# Altium PCB IdealDiode 03-1.0.PcbDoc
Units mm, origin at the board's own origin, x right, y up, seen from the top; angles counter-clockwise.
Board outline 5.33 x 10.41 mm, 2 copper layers (Top Layer, Bottom Layer), stack 1.025 mm thick; 10 components, 6 nets, 21 pads, 4 vias.
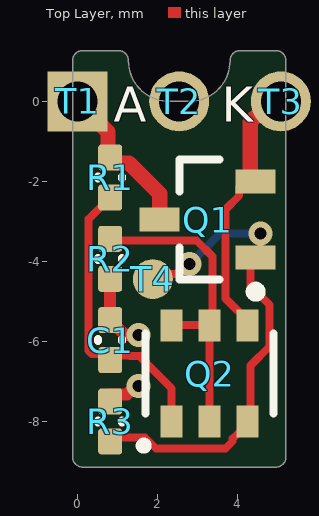
[diagram p0: Top Layer view]
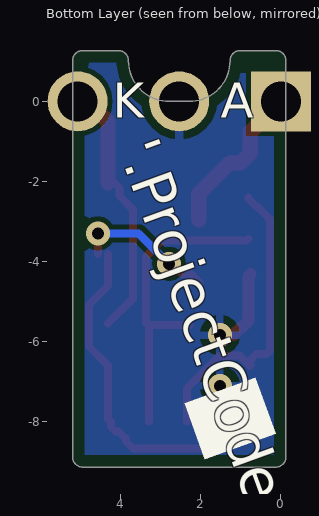
[diagram p1: Bottom Layer view, seen from below]

## Layer stack, top to bottom
Top Solder: solder mask 0.0102, Solder Resist, Dk 3.5
Top Layer: signal copper 0.0356
Dielectric 1: core 0.954, FR-4, Dk 4.2
Bottom Layer: signal copper 0.0356
Bottom Solder: solder mask 0.0102, Solder Resist, Dk 3.5

## Board outline
-0.127,-8.89 -0.127,1.016 cw(c0.127,1.016) 0.127,1.27 1.016,1.27 cw(c1.016,1.016) 1.27,1.016 ccw(c2.286,1.016) 2.286,0 2.794,0 ccw(c2.794,1.016) 3.81,1.016 cw(c4.064,1.016) 4.064,1.27 4.953,1.27 cw(c4.953,1.016) 5.207,1.016 5.207,-8.89 cw(c4.953,-8.89) 4.953,-9.144 0.127,-9.144 cw(c0.127,-8.89)

## Design rules (kind name [scope] priority, off if disabled: settings)
AssemblyTestPointUsage [All] p1: valid=2
AssemblyTestpoint [All] p1: testpointundercomponent=TRUE minsize=1.016 maxsize=2.54 preferedsize=1.524 minholesize=0 maxholesize=1.016 preferedholesize=0.813 testpointgrid=0.025 usegrid=FALSE gridtolerance=0 allowsidetop=TRUE allowsidebottom=TRUE
BoardOutlineClearance [All] p1: gap=0.3 ignorepadtopadclearanceinfootprint=FALSE except(0: Arc-SplitContinuation Track-SplitContinuation SMDPad-SplitContinuation THPad-SplitContinuation Via-SplitContinuation Fill-SplitContinuation Poly-SplitContinuation Region-SplitContinuation Text-SplitContinuation)
Clearance [All] p1: gap=0.125 ignorepadtopadclearanceinfootprint=FALSE except(0: Arc-Hole Track-Hole SMDPad-Hole THPad-Hole Via-Hole Fill-Hole Poly-Hole Region-Hole Text-Hole)
ComponentClearance [All] p1: gap=0.1 collisioncheckmode=3 verticalgap=0.254 showdistances=TRUE
DiffPairsRouting [All] p1: maxlimit=2 minlimit=0.15 mostfreqgap=0.15 toplayer_minwidth=0.15 toplayer_maxwidth=2 toplayer_prefwidth=0.15 bottomlayer_minwidth=0.15 bottomlayer_maxwidth=2 bottomlayer_prefwidth=0.15 maxuncoupledlength=25
FabricationTestPointUsage [All] p1: valid=2 allowmultiple=FALSE
FabricationTestpoint [All] p1: side=3 testpointundercomponent=TRUE minsize=1.016 maxsize=2.54 preferedsize=1.524 minholesize=0 maxholesize=1.016 preferedholesize=0.813 testpointgrid=0.025 allowsidetop=TRUE allowsidebottom=TRUE usegrid=FALSE gridtolerance=0
HoleSize [All] p1: absolutevalues=TRUE maxlimit=2.54 minlimit=0.2 maxpercent=80.000 minpercent=20.000
MinimumSolderMaskSliver [All] p1: minsoldermaskwidth=0.005
PlaneClearance [All] p1: clearance=0.3
PlaneConnect [All] p1: planeconnectstyle=Relief reliefexpansion=0.5 reliefentries=4 reliefconductorwidth=0.2 reliefairgap=0.3
PolygonConnect "PolygonConnect GND" [isVIA] p1: connectstyle=Relief reliefconductorwidth=0.2 reliefentries=4 polygonreliefangle="90 Angle" airgapwidth=0.2
PolygonConnect [All] p2: connectstyle=Relief reliefconductorwidth=0.2 reliefentries=4 polygonreliefangle="90 Angle" airgapwidth=0.2
RoutingVias [All] p1: holewidth=0.3 width=0.6 viastyle="Through Hole" minholewidth=0.3 minwidth=0.6 maxholewidth=0.3 maxwidth=0.8
SilkToSilkClearance [All] p1: silktosilkclearance=0.001
SilkToSolderMaskClearance [IsPad] p1: minsilkscreentomaskgap=0.05 clearancetoexposedcopper=TRUE
SolderMaskExpansion [All] p1: expansion=0.075
Width [All] p1: maxlimit=2 minlimit=0.15 preferedwidth=0.15 minimp=50.000000 maximp=50.000000 favimp=50.000000
18 further rules are at their usual default settings.

## Components (designator, comment, footprint, x,y, rotation, side; value= is the part's Value field where it differs from the comment)
C1 "0402YG104ZAT2A" CAP0402 0.813,-5.969 r270 top
Q1 "MOSFET" DIODES-SOT23-3 3.251,-2.959 r180 top
Q2 "BCM857DS" NXP-SOT457 3.302,-6.807 r0 top
R1 "" RES0402 0.813,-1.905 r90 top value=1k5
R2 "" RES0402 0.813,-3.937 r270 top value=150k
R3 "" RES0402 0.813,-8.001 r90 top value=330k
T1 "TestPointHole" PTH1.5mm-1.0mm#1 0,-0.254 r0 top
T2 "TestPointHole" PTH1.5mm-1.0mm#2 2.54,-0.254 r0 top
T3 "TestPointHole" PTH1.5mm-1.0mm#2 5.08,-0.254 r0 top
T4 "TestPoint" Pad1mm 1.88,-4.444 r0 top

## Footprints (in the part's own frame and the unit in brackets; to place one, negate y for a bottom-side part, rotate by r counter-clockwise, add the part's x,y. Pads: shape width x height; smd on the part's side, far side on the other; paste and mask are expansions set on the pad)
CAP0402 [mm] "Chip Capacitor 0402"
  rrect25% 0.65x0.6 smd: 1(-0.5,0) 2(0.5,0)
  silkscreen extent -0.03,-0.3 0.03,0.3, body extent -0.53,-0.28 0.53,0.27, height 0.5
DIODES-SOT23-3 [mm] "SOT23, 3-Leads, Body 2.90x2.45mm, Pitch 0.95mm, IPC Medium Density"
  rect 1x0.6 smd: 1(-1.2,0.95) 2(-1.2,-0.95) 3(1.2,0)
  silkscreen extent -1.33,-1.5 0.7,1.92, body extent -1.27,-1.5 1.23,1.5, height 1.1
NXP-SOT457 [mm]
  rect 0.55x0.8 smd: 1(-0.95,-1.2) 2(0,-1.2) 3(0.95,-1.2) 4(0.95,1.2) 5(0,1.2) 6(-0.95,1.2)
  silkscreen extent -1.75,-1.9 1.6,1, body extent -1.55,-1.6 1.55,1.6, height 1.45
Pad1mm [mm] "Testpoint Pad 1mm diameter"
  round 1 smd paste-1: 1(0,0)
PTH1.5mm-1.0mm#1 [mm] "1.5mm dia round pad w/ 1.0mm dia hole"
  rect 1.5x1.5 hole 1: 1(0,0.254)
PTH1.5mm-1.0mm#2 [mm] "1.5mm dia round pad w/ 1.0mm dia hole"
  round 1.5 hole 1: 1(0,0.254)
RES0402 [mm] "Chip Resistor 0402"
  rrect25% 0.65x0.6 smd: 1(-0.5,0) 2(0.5,0)
  silkscreen extent -0.03,-0.3 0.03,0.3, body extent -0.53,-0.28 0.53,0.27, height 0.35

## Part data
C1: "100nF 0402 16V", Capacitance=100nF, Case/Package=0402, Case Code (Metric)=1005, Dielectric=Y5V, Insulation Resistance=100GR, Manufacturer="Kyocera AVX", Max Operating Temperature=85°C, Min Operating Temperature=-30°C, Package Quantity=1, Supplier Part Number 1=478-1138-1-ND, Tolerance=80%, Voltage=16V, Case Code (Imperial)=0402, ComponentLink2Description="AVX datasheet online", ComponentLink2URL=http://datasheets.avx.com/Y5V.pdf, Contact Plating=Tin,Matte, Depth=0.5mm, Dissipation Factor=9%, Height=0.5mm, Lead Free="Lead Free", Length=1mm, Manufacturer Part Number=0402YG104ZAT2A, Mount="Surface Mount,PCB", Packaging="Tape and Reel", Pricing 1="1=0.1, 10=0.041, 100=0.0183, 500=0.01306, 1000=0.01026, 2500=0.00933, 5000=0.00858 (USD)", Radiation Hardening=No, REACH SVHC="No SVHC", Stock 1=0, Supplier 1=Digi-Key, Supplier 2=Farnell, Supplier 3=Mouser, Supplier 4=RSComponents, Supplier Part Number 2=1327667, Supplier Part Number 3=581-040216G104Z, Supplier Part Number 4=698-3190, Termination=SMD/SMT, Thickness=0.022inch, Voltage Rating=16V, Voltage Rating (DC)=16V, Width=0.02inch
Q1: library part DMG2305UX-whitesch, "MOSFET P-CH 20V 4.2A SOT23", Case/Package=TO-236-3, Continuous Drain Current (ID)=4.2A, Drain to Source Breakdown Voltage=-20V, Drain to Source Resistance=52mR, Drain to Source Voltage (Vdss)=20V, Gate to Source Voltage (Vgs)=8V, Input Capacitance=808pF, Manufacturer=Diodes, Manufacturer Part Number=DMG2305UX-13, Max Operating Temperature=150°C, Max Power Dissipation=1.4W, Min Operating Temperature=-55°C, On-State Resistance=65MR, Package Quantity=1, Supplier Part Number 1=DMG2305UX-13DICT-ND, Threshold Voltage=-900mV, ComponentLink2Description="online datasheet", ComponentLink2URL=https://datasheet.ciiva.com/18566/dmg2305ux-18566951.pdf, ComponentLink3Description=datasheet, ComponentLink3URL="Y:\System\Altium\Libraries 2014\Diodes Inc\Datasheets\dmg2305ux-30023840.pdf", Element Configuration=Single, Fall Time=34.7ns, Height=1.1mm, Lead Free="Lead Free", Length=3mm, Mount="Surface Mount", Number of Channels=1, Number of Pins=3, Packaging="Tape and Reel", Pricing 1="1=0.44, 10=0.398, 100=0.2228, 500=0.1194, 1000=0.0812 (USD)", Radiation Hardening=No, Rds On Max=52mR, REACH SVHC="No SVHC", Rise Time=13.7ns, Stock 1=131638, Supplier 1=Digi-Key, Supplier 2=Farnell, Supplier 3=Mouser, Supplier 4=RSComponents, Supplier Part Number 2=2543533, Supplier Part Number 3=621-DMG2305UX-7, Supplier Part Number 4=8270452, Turn-Off Delay Time=79.3ns, Turn-On Delay Time=10.8ns, Weight=0.000282oz, Width=1.4mm
Q2: library part BCM857DS,115-whitesch, "BJT ARRAY, DUAL PNP, -45V, -100MA, 6-SOT-457", Case/Package=SOT-457, Collector Base Voltage (VCBO)=50V, Collector Emitter Breakdown Voltage=45V, Emitter Base Voltage (VEBO)=5V, Frequency=175MHz, Manufacturer="NXP Semiconductors", Manufacturer Part Number=BCM857DS,115, Max Collector Current=100mA, Max Operating Temperature=150°C, Max Power Dissipation=380mW, Min Operating Temperature=-65°C, Package Quantity=1, Supplier Part Number 1=1727-4884-1-ND, Test Current=5mA, Tolerance=5%, Zener Voltage=3.3V, Collector Emitter Voltage (VCEO)=45V, ComponentLink1Description="online datasheet", ComponentLink1URL=https://assets.nexperia.com/documents/data-sheet/BCM857BV_BS_DS.pdf, Contact Plating=Tin, Element Configuration=Dual, Gain Bandwidth Product=175MHz, Height=0.25inch, Lead Free="Lead Free", Length=0.25inch, Max Breakdown Voltage=45V, Mount="Surface Mount", Number of Elements=2, Number of Pins=6, Packaging="Tape and Reel", Polarity=PNP, Power Dissipation=380mW, Pricing 1="1=0.46, 10=0.343, 100=0.2137, 500=0.1462, 1000=0.1125 (USD)", Radiation Hardening=No, REACH SVHC="No SVHC", Stock 1=369, Supplier 1=Digi-Key, Transition Frequency=175MHz, Weight=0.01lb, Width=0.25inch
R1 R2 R3: library part RES0402_GENERIC, "Generic 0402 Chip Resistor", Case=0402
T1 T2 T3: "Test Point With Hole"
T4: "Test Point"

## Via types
v1: diameter 0.6, hole 0.3, Top Layer to Bottom Layer, tented both sides, 4 vias

## Nets (pads, with @x,y where several pads share a name; then routed paths per layer and width w, separated by ;. In a path a pad name is that pad's centre, name@x,y a point inside that pad or via, vN(x,y) a via of type N, cw(c..) or ccw(c..) an arc to the next point about the centre after c; other vN are vias at no path point)
Anode: Q1.3 R1.2 T1.1 | length 3.9
  Top Layer w0.381: T1.1@0.273,0 0.273,-0.273 0.762,-0.762 0.762,-1.288 1.013,-1.539 1.285,-1.539 2.051,-2.305 Q1.3
Cathode: Q1.2 Q2.4 T3.1 | length 6.5
  Top Layer w0.2: Q1.2@4.19,-2.009 4.04,-2.159 4.04,-2.359 3.698,-2.701 3.698,-4.928 Q2.4@4.318,-5.548 ; T3.1@4.553,-0.273 4.807,-0.273 T3.1
  Top Layer w0.381: Q1.2@4.318,-2.032 4.318,-0.508 T3.1@4.553,-0.273
GND: C1.1 R2.2 R3.2 T2.1 | length 2.9
  Top Layer w0.3: R3.2@0.762,-7.366 0.802,-7.326 1.229,-7.326 1.443,-7.112 v1(1.524,-7.112) ; R2.2@0.762,-4.318 0.813,-4.369 R2.2 C1.1 0.813,-5.494 0.963,-5.644 0.988,-5.644 1.186,-5.842 v1(1.524,-5.842)
NetC1_2: C1.2 Q2.1 R1.1 | length 7.7
  Top Layer w0.2: R1.1 0.813,-2.43 0.613,-2.63 0.588,-2.63 0.273,-2.945 0.273,-6.233 0.358,-6.318 0.613,-6.318 0.762,-6.467 0.762,-6.604 0.772,-6.614 C1.2@1.036,-6.35 ; C1.2@1.016,-6.35 C1.2@1.036,-6.35 ; Q2.1 2.352,-7.178 1.541,-6.367 1.307,-6.367 1.29,-6.35 C1.2@1.036,-6.35
NetQ1_1: Q1.1 Q2.3 R3.1 T4.1 | length 12.2
  Top Layer w0.2: R3.1@0.762,-8.382 0.779,-8.399 1.68,-8.399 1.963,-8.682 3.691,-8.682 3.877,-8.496 3.877,-8.433 4.053,-8.257 4.127,-8.257 4.252,-8.132 Q2.3 4.318,-7.941 4.318,-6.605 4.802,-6.121 4.802,-5.093 4.318,-4.609 Q1.1@4.318,-3.81 ; T4.1@2.032,-4.572 2.032,-4.527 2.249,-4.31 2.477,-4.31 2.723,-4.064 v1(2.794,-4.064) ; Q1.1@4.572,-3.81 v1(4.572,-3.302)
  Bottom Layer w0.2: v1(2.794,-4.064) 3.556,-3.302 v1(4.572,-3.302)
NetQ2_2: Q2.2 Q2.5 Q2.6 R2.1 | length 7.9
  Top Layer w0.2: R2.1 0.859,-3.484 2.976,-3.484 3.373,-3.881 3.373,-5.536 Q2.5 ; Q2.6@2.286,-5.588 3.283,-5.588 Q2.5 ; Q2.2 Q2.5

## Polygon pours and split planes (outlines as drawn)
GND on Top Layer "Top Layer-GND" (solid, remove dead copper, shelved, pour order 4): -2.476,3.556 -2.476,-11.747 7.556,-11.747 7.556,3.556
GND on Bottom Layer "Bottom Layer-GND" (solid, remove dead copper, pour order 2): -2.476,3.619 -2.476,-11.747 7.556,-11.747 7.556,3.619

## Other copper
Bottom Layer:
  region: 17.236,-6.118
  region: 17.236,-6.118

## Silkscreen, mask and mechanical layers (free items; w line width, h text height)
Top Overlay:
  text "A" at 0.9,-0.8 h1.5
  text "K" at 3.6,-0.8 h1.5
Bottom Overlay:
  region: 0.638,-6.9 0.124,-8.311 1.9,-8.958 2.414,-7.547
  region: 2.424,0.297
  region: 11.011,1.181
  text "A" at 1.5,-0.7 h1.5
  text "K" at 4.2,-0.7 h1.5
  text "'.ProjectCodenameID'-'.ProjectRevision'" at 4.4,-1.3 h1.8 r70
Board outline:
  the board outline again, w0.2
Top Assy:
  lines w0.127: -0.127,-8.89 ccw(c0.127,-8.89) 0.127,-9.144 4.953,-9.144 ccw(c4.953,-8.89) 5.207,-8.89 5.207,1.016 ccw(c4.953,1.016) 4.953,1.27 0.127,1.27 ccw(c0.127,1.016) -0.127,1.016 -0.127,-8.89

## Dimensions
5.207,1.016 to -0.127,1.016 on Dimensions
8,-9.144 to 7.8,1.256 on Dimensions